# EAGLE board main -old (EAGLE 8.3.1)
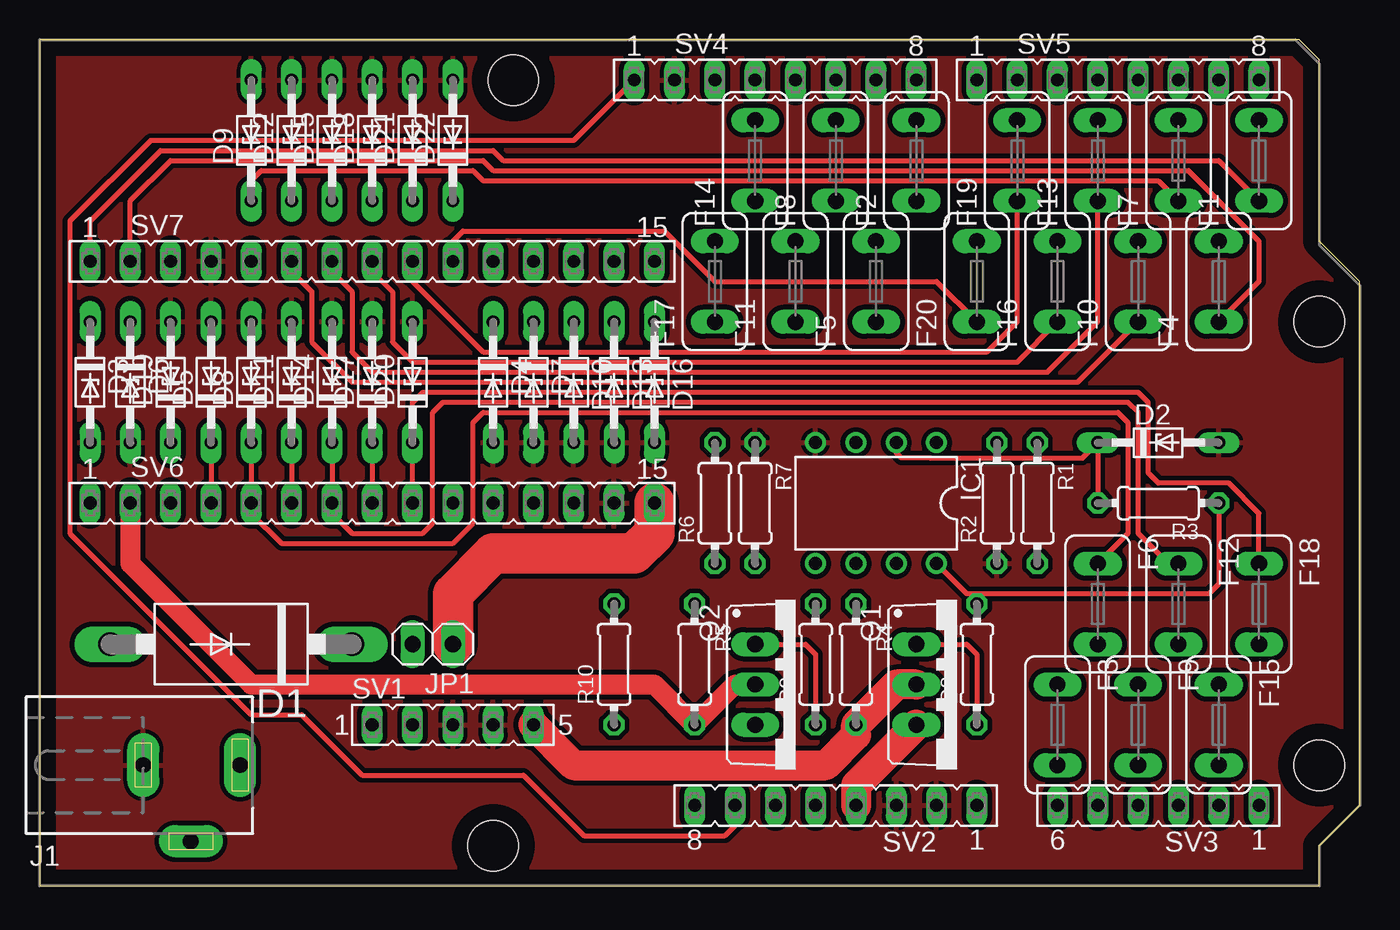
[diagram p0: board, top side]
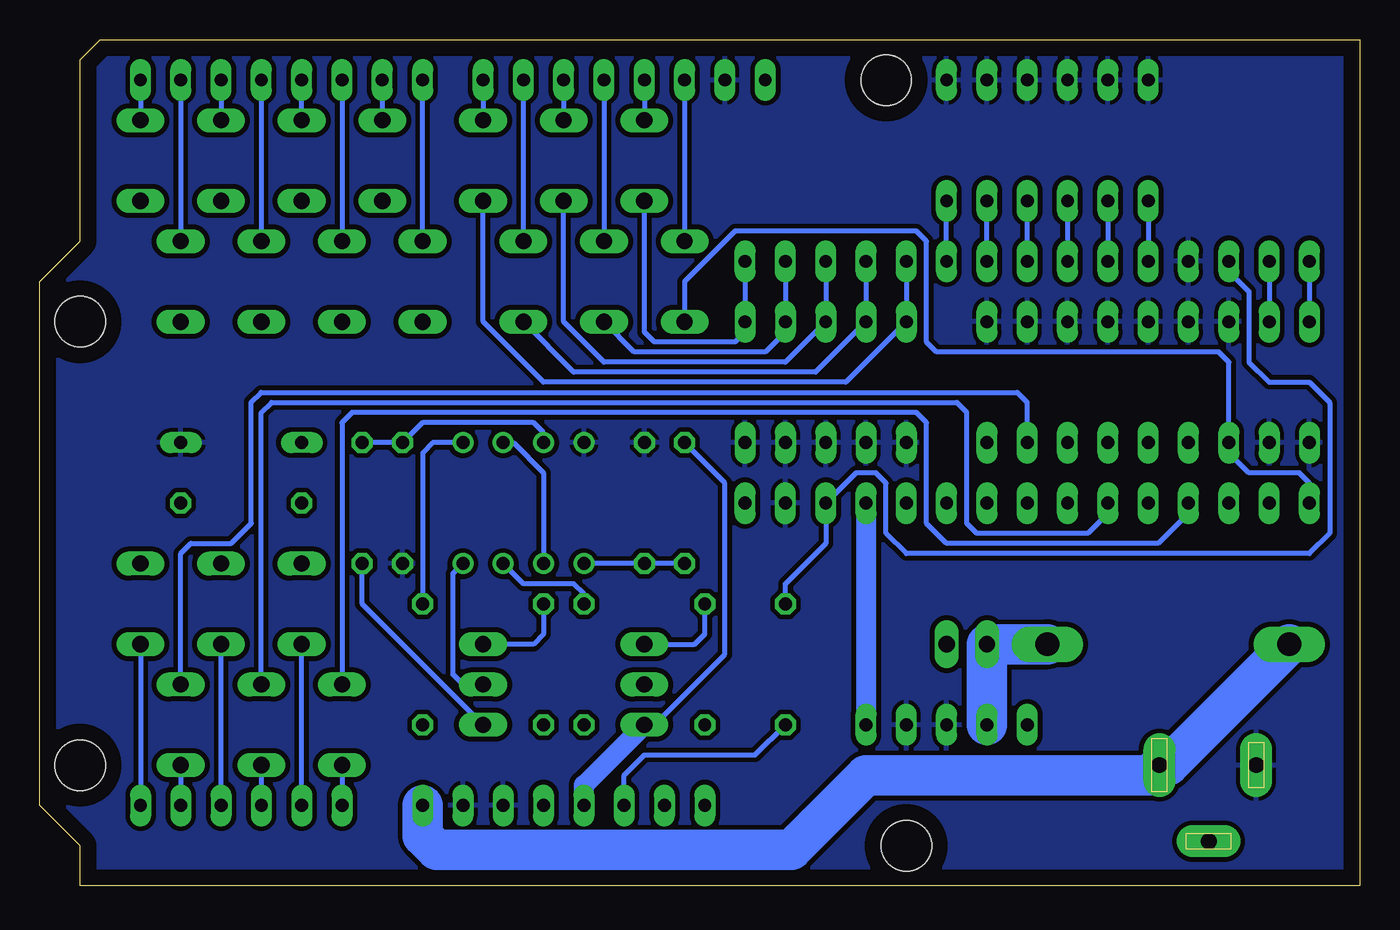
[diagram p1: board, bottom side, seen from below]

Size 83.18 x 53.34 mm. Coordinates in mm from the lower left corner, seen from the top.
Outline: 0,0 80.64,0 80.64,2.54 83.18,5.08 83.18,38.1 80.64,40.64 80.64,52.07 79.38,53.34 0,53.34 0,0
Copper layers (1*16): Top 0.035mm / dielectric 1.5mm / Bottom 0.035mm
Design rules "default": minimum track width 6mil, minimum drill 0.35mm, track to track 6mil, track to pad 6mil, pad to pad 6mil, via to via 6mil, smd to smd 6mil, copper to edge 40mil, drill to drill 6mil, minimum pad ring 10mil, minimum via ring 8mil, stop-mask expansion 4mil, vias tented up to drill 0mil, thermal gap 10mil
Holes 3.17 mm at 29.84,50.8 80.64,35.56 80.64,7.62 28.57,2.54

## Footprints (pad centres in the part's own frame; a part is rotated, then mirrored left to right if it is on the bottom)
P2-15 = drill 1.499 long: A 7.62,0; C -7.62,0
DO34Z7 = drill 0.813 long: A 3.81,0; C -3.81,0
TE5 = drill 1.016 long: 1 -2.54,0; 2 2.54,0
DIL08 = drill 0.813 pad 1.27: 1 -3.81,-3.81; 2 -1.27,-3.81; 3 1.27,-3.81; 4 3.81,-3.81; 5 3.81,3.81; 6 1.27,3.81; 7 -1.27,3.81; 8 -3.81,3.81
DCJ0303 = drill 1 pad 2 long: 1 0,3.1; 2 4.8,0; 3 0,-3
1X02 = drill 1.016 long: 1 -1.27,0; 2 1.27,0
TO220BV = drill 1.016 long: D 0,-2.54; G -2.54,-2.54; S 2.54,-2.54
0204/7 = drill 0.813 octagon: 1 -3.81,0; 2 3.81,0
FE05-1 = drill 0.813 long: 1 -5.08,0; 2 -2.54,0; 3 0,0; 4 2.54,0; 5 5.08,0
FE08 = drill 0.813 long: 1 -8.89,0; 2 -6.35,0; 3 -3.81,0; 4 -1.27,0; 5 1.27,0; 6 3.81,0; 7 6.35,0; 8 8.89,0
FE06 = drill 0.813 long: 1 -6.35,0; 2 -3.81,0; 3 -1.27,0; 4 1.27,0; 5 3.81,0; 6 6.35,0
FE15 = drill 0.813 long: 1 -17.78,0; 2 -15.24,0; 3 -12.7,0; 4 -10.16,0; 5 -7.62,0; 6 -5.08,0; 7 -2.54,0; 8 0,0; 9 2.54,0; 10 5.08,0; 11 7.62,0; 12 10.16,0; 13 12.7,0; 14 15.24,0; 15 17.78,0

## Placement (x,y rotation side)
D1  BA296  [P2-15]  12.06,15.24 180 top
D2  BZX90  [DO34Z7]  70.48,27.94 0 top
D3  BZX90  [DO34Z7]  3.17,31.75 270 top
D4  BZX90  [DO34Z7]  28.57,31.75 270 top
D5  BZX90  [DO34Z7]  10.79,31.75 90 top
D6  BZX90  [DO34Z7]  5.71,31.75 270 top
D7  BZX90  [DO34Z7]  31.11,31.75 270 top
D8  BZX90  [DO34Z7]  13.34,31.75 90 top
D9  BZX90  [DO34Z7]  13.34,46.99 90 top
D10  BZX90  [DO34Z7]  33.66,31.75 270 top
D11  BZX90  [DO34Z7]  15.88,31.75 90 top
D12  BZX90  [DO34Z7]  15.88,46.99 90 top
D13  BZX90  [DO34Z7]  36.2,31.75 270 top
D14  BZX90  [DO34Z7]  18.41,31.75 90 top
D15  BZX90  [DO34Z7]  18.41,46.99 90 top
D16  BZX90  [DO34Z7]  38.73,31.75 270 top
D17  BZX90  [DO34Z7]  20.95,31.75 90 top
D18  BZX90  [DO34Z7]  20.95,46.99 90 top
D19  BZX90  [DO34Z7]  8.26,31.75 90 top
D20  BZX90  [DO34Z7]  23.49,31.75 90 top
D21  BZX90  [DO34Z7]  23.49,46.99 90 top
D22  BZX90  [DO34Z7]  26.04,46.99 90 top
F1  FUSETE5  [TE5]  76.83,45.72 90 top
F2  FUSETE5  [TE5]  55.25,45.72 90 top
F3  FUSETE5  [TE5]  64.13,10.16 270 top
F4  FUSETE5  [TE5]  74.3,38.1 90 top
F5  FUSETE5  [TE5]  52.71,38.1 90 top
F6  FUSETE5  [TE5]  66.67,17.78 270 top
F7  FUSETE5  [TE5]  71.75,45.72 90 top
F8  FUSETE5  [TE5]  50.16,45.72 90 top
F9  FUSETE5  [TE5]  69.21,10.16 270 top
F10  FUSETE5  [TE5]  69.21,38.1 90 top
F11  FUSETE5  [TE5]  47.62,38.1 90 top
F12  FUSETE5  [TE5]  71.75,17.78 270 top
F13  FUSETE5  [TE5]  66.67,45.72 90 top
F14  FUSETE5  [TE5]  45.09,45.72 90 top
F15  FUSETE5  [TE5]  74.3,10.16 270 top
F16  FUSETE5  [TE5]  64.13,38.1 90 top
F17  FUSETE5  [TE5]  42.55,38.1 90 top
F18  FUSETE5  [TE5]  76.83,17.78 270 top
F19  FUSETE5  [TE5]  61.59,45.72 90 top
F20  FUSETE5  [TE5]  59.05,38.1 90 top
IC1  LM358N  [DIL08]  52.71,24.13 180 top
J1  [DCJ0303]  9.53,7.62 270 top
JP1  [1X02]  24.76,15.24 180 top
Q1  IRF9530  [TO220BV]  57.79,12.7 270 top
Q2  IRF9530  [TO220BV]  47.62,12.7 270 top
R1  [0204/7]  62.87,24.13 270 top
R2  [0204/7]  60.33,24.13 90 top
R3  [0204/7]  70.48,24.13 180 top
R4  10k  [0204/7]  51.44,13.97 270 top
R5  10k  [0204/7]  41.27,13.97 270 top
R6  [0204/7]  42.55,24.13 90 top
R7  [0204/7]  45.09,24.13 270 top
R8  300  [0204/7]  59.05,13.97 90 top
R9  300  [0204/7]  48.9,13.97 90 top
R10  1k  [0204/7]  36.2,13.97 90 top
SV1  [FE05-1]  26.04,10.16 0 top
SV2  [FE08]  50.16,5.08 180 top
SV3  [FE06]  70.48,5.08 180 top
SV4  [FE08]  46.36,50.8 0 top
SV5  [FE08]  67.94,50.8 0 top
SV6  [FE15]  20.95,24.13 0 top
SV7  [FE15]  20.95,39.37 0 top

## Library data of the parts
D1-D22 = diode
F1-F20 = fuse; OC_FARNELL: unknown; OC_NEWARK: unknown
IC1 = linear
J1 = con-jack; OC_FARNELL: unknown; OC_NEWARK: unknown
JP1 = pinhead
Q1 Q2 = transistor-power
R1-R10 = rcl
SV1-SV7 = con-lsta; OC_FARNELL: unknown; OC_NEWARK: unknown

## Nets
3V3: Q2.D R5.2 SV6.2
3V3': Q2.S R6.2 SV2.5
3V3EN: IC1.7 R9.2
5V: IC1.8 Q1.D R3.1 R4.2 SV1.5 SV6.12
5V': Q1.S R1.2 SV2.4
5VEN: IC1.1 R8.2
A0: D5.C F3.1 SV6.4
A0': F3.2 SV3.6
A1: D8.C F6.1 SV6.5
A1': F6.2 SV3.5
A2: D11.C F9.1 SV6.6
A2': F9.2 SV3.4
A3: D14.C F12.1 SV6.7
A3': F12.2 SV3.3
A4: D17.C F15.1 SV6.8
A4': F15.2 SV3.2
A5: D20.C F18.1 SV6.9
A5': F18.2 SV3.1
AREF: SV6.3
AREF': SV2.7 SV4.1
D0: D3.C F1.1 SV7.1
D0': F1.2 SV5.8
D1: D6.C F4.1 SV7.2
D1': F4.2 SV5.7
D2: D9.C F7.1 SV7.5
D2': F7.2 SV5.6
D3: D12.C F10.1 SV7.6
D3': F10.2 SV5.5
D4: D15.C F13.1 SV7.7
D4': F13.2 SV5.4
D5: D18.C F16.1 SV7.8
D5': F16.2 SV5.3
D6: D21.C F19.1 SV7.9
D6': F19.2 SV5.2
D7: D22.C F20.1 SV7.10
D7': F20.2 SV5.1
D8: D4.C F2.1 SV7.11
D8': F2.2 SV4.8
D9: D7.C F5.1 SV7.12
D9': F5.2 SV4.7
D10: D10.C F8.1 SV7.13
D10': F8.2 SV4.6
D11: D13.C F11.1 SV7.14
D11': F11.2 SV4.5
D12: D16.C F14.1 SV7.15
D12': F14.2 SV4.4
D13: D19.C F17.1 SV6.1
D13': F17.2 SV4.3
GND: D2.A D3.A D4.A D5.A D6.A D7.A D8.A D9.A D10.A D11.A D12.A D13.A D14.A D15.A D16.A D17.A D18.A D19.A D20.A D21.A D22.A IC1.4 J1.3 R2.1 R7.1 SV1.3 SV1.4 SV2.2 SV2.3 SV4.2 SV6.14 SV7.4
N$2: D1.C JP1.2 SV1.2
N$3: Q2.G R5.1 R9.1
N$4: Q1.G R4.1 R8.1
N$6: IC1.3 R1.1 R2.2
N$7: IC1.5 R6.1 R7.2
RST: R10.2 SV6.13 SV7.3
RST': R10.1 SV2.6
VIN: JP1.1 SV6.15
VIN': D1.A J1.1 SV2.1
VREF2.4: D2.C IC1.2 IC1.6 R3.2

## Tracks (layer width: path | path; a pad name or v marks a point on that pad's centre or on a via)
3V3
  Top 1.27: Q2.D 43.82,12.7 R5.2 38.73,12.7 13.34,12.7 5.71,20.32 SV6.2
3V3'
  Bottom 0.305: Q2.S 44.45,10.16 40.01,14.6 40.01,25.4 R6.2
  Bottom 1.27: SV2.5 48.9,6.35 Q2.S
3V3EN
  Bottom 0.305: R9.2 48.9,18.41 49.53,19.05 52.71,19.05 IC1.7
5V
  Top 0.305: R3.1 74.3,19.05 73.66,18.41 58.42,18.41 IC1.8
  Top 1.905: Q1.D 53.98,12.7 R4.2 51.44,9.52 49.53,7.62 33.66,7.62 SV1.5
  Bottom 0.305: Q1.D 56.52,12.7 57.15,13.34 57.15,19.69 IC1.8
  Bottom 1.27: SV6.12 SV1.5
5V'
  Top 1.905: Q1.S 51.44,6.35 SV2.4
  Bottom 0.305: Q1.S 62.87,17.78 R1.2
5VEN
  Bottom 0.305: IC1.1 58.42,27.94 59.05,27.3 R8.2
A0
  Top 0.305: D5.C SV6.4
  Bottom 0.305: SV6.4 10.79,23.49 12.7,21.59 26.04,21.59 27.3,22.86 27.3,29.21 27.94,29.84 63.5,29.84 64.13,29.21 F3.1
A0'
  Bottom 0.305: F3.2 SV3.6
A1
  Top 0.305: D8.C SV6.5 13.34,23.49 15.24,21.59 26.04,21.59 27.3,22.86 27.3,29.21 27.94,29.84 67.94,29.84 68.58,29.21 68.58,22.23 F6.1
A1'
  Bottom 0.305: SV3.5 F6.2
A2
  Top 0.305: D11.C SV6.6
  Bottom 0.305: SV6.6 15.88,23.49 17.14,22.23 24.13,22.23 24.76,22.86 24.76,29.84 25.4,30.48 68.58,30.48 69.21,29.84 F9.1
A2'
  Bottom 0.305: F9.2 SV3.4
A3
  Top 0.305: D14.C SV6.7 18.41,23.49 19.68,22.23 24.13,22.23 24.76,22.86 24.76,29.84 25.4,30.48 68.58,30.48 69.21,29.84 69.21,22.23 71.12,20.32 F12.1
A3'
  Bottom 0.305: SV3.3 F12.2
A4
  Top 0.305: D17.C SV6.8
  Bottom 0.305: D17.C 20.95,30.48 21.59,31.12 69.24,31.12 69.85,30.51 69.85,22.86 71.12,21.59 73.66,21.59 74.3,20.95 F15.1
A4'
  Bottom 0.305: F15.2 SV3.2
A5
  Top 0.305: SV6.9 D20.C 23.49,30.48 24.13,31.12 69.21,31.12 69.85,30.48 69.85,26.03 70.48,25.4 74.93,25.4 76.83,23.49 F18.1
A5'
  Bottom 0.305: F18.2 SV3.1
AREF'
  Top 0.305: SV2.7 43.82,3.81 43.18,3.18 34.29,3.18 30.48,6.98 20.32,6.98 16.51,10.79 13.34,10.79 1.91,22.23 1.91,41.91 6.99,46.99 33.66,46.99 SV4.1
D0
  Top 0.305: SV7.1 3.17,41.91 7.62,46.35 28.57,46.35 29.21,45.72 74.3,45.72 F1.1
  Bottom 0.305: SV7.1 D3.C
D0'
  Bottom 0.305: SV5.8 F1.2
D1
  Top 0.305: SV7.2 5.71,43.18 8.26,45.72 27.94,45.72 28.57,45.09 72.39,45.09 76.83,40.64 76.83,38.1 F4.1
  Bottom 0.305: SV7.2 D6.C
D1'
  Bottom 0.305: SV5.7 F4.2
D2
  Top 0.305: D9.C 13.34,44.45 13.97,45.09 27.3,45.09 27.94,44.45 70.48,44.45 F7.1
  Bottom 0.305: D9.C SV7.5
D2'
  Bottom 0.305: SV5.6 F7.2
D3
  Top 0.305: SV7.6 15.88,38.73 17.14,37.46 17.14,34.29 19.68,31.75 65.41,31.75 F10.1
  Bottom 0.305: D12.C SV7.6
D3'
  Bottom 0.305: SV5.5 F10.2
D4
  Top 0.305: SV7.7 18.41,38.73 19.68,37.46 19.68,33.66 20.95,32.38 63.5,32.38 66.67,35.56 F13.1
  Bottom 0.305: D15.C SV7.7
D4'
  Bottom 0.305: F13.2 SV5.4
D5
  Top 0.305: SV7.8 20.95,38.73 22.22,37.46 22.22,34.29 23.49,33.02 61.59,33.02 F16.1
  Bottom 0.305: SV7.8 D18.C
D5'
  Bottom 0.305: SV5.3 F16.2
D6
  Top 0.305: SV7.9 23.49,38.1 27.94,33.66 59.69,33.66 61.59,35.56 F19.1
  Bottom 0.305: SV7.9 D21.C
D6'
  Bottom 0.305: SV5.2 F19.2
D7
  Top 0.305: SV7.10 26.04,40.64 26.67,41.27 39.37,41.27 42.55,38.1 56.52,38.1 F20.1
  Bottom 0.305: SV7.10 D22.C
D7'
  Bottom 0.305: F20.2 SV5.1
D8
  Bottom 0.305: SV7.11 D4.C 32.39,31.75 51.44,31.75 55.25,35.56 F2.1
D8'
  Bottom 0.305: SV4.8 F2.2
D9
  Bottom 0.305: SV7.12 D7.C 34.29,32.38 49.53,32.38 F5.1
D9'
  Bottom 0.305: F5.2 SV4.7
D10
  Bottom 0.305: SV7.13 D10.C 36.2,33.02 47.62,33.02 50.16,35.56 F8.1
D10'
  Bottom 0.305: SV4.6 F8.2
D11
  Bottom 0.305: SV7.14 D13.C 36.2,34.92 37.47,33.66 45.72,33.66 F11.1
D11'
  Bottom 0.305: SV4.5 F11.2
D12
  Bottom 0.305: SV7.15 D16.C 38.73,34.92 39.37,34.29 44.45,34.29 45.09,34.92 F14.1
D12'
  Bottom 0.305: SV4.4 F14.2
D13
  Bottom 0.305: SV6.1 3.17,25.4 3.81,26.03 6.99,26.03 8.26,27.3 D19.C 8.26,33.02 8.89,33.66 26.67,33.66 27.3,34.29 27.3,40.64 27.94,41.27 39.37,41.27 42.55,38.1 F17.1
D13'
  Bottom 0.305: SV4.3 F17.2
GND
  pour Bottom (isolate 0.305): 0,0 80.64,0 80.64,2.54 83.18,5.08 83.18,38.1 80.64,40.64 80.64,52.07 79.38,53.34 0,53.34
  pour Top (isolate 0.305): 0,0 80.64,0 80.64,2.54 83.18,5.08 83.18,38.1 80.64,40.64 80.64,52.07 79.38,53.34 0,53.34
N$2
  Bottom 2.54: SV1.2 JP1.2 D1.C
N$3
  Top 0.305: Q2.G 48.26,15.24 48.9,14.6 R9.1
  Bottom 0.305: Q2.G 41.91,15.24 41.27,15.88 R5.1
N$4
  Top 0.305: Q1.G 58.42,15.24 59.05,14.6 R8.1
  Bottom 0.305: R4.1 51.44,15.88 52.07,15.24 Q1.G
N$6
  Bottom 0.305: IC1.3 51.44,28.58 52.07,29.21 59.05,29.21 R2.2 R1.1
N$7
  Bottom 0.305: R6.1 R7.2 IC1.5
RST
  Bottom 0.305: R10.2 36.2,19.05 33.66,21.59 SV6.13 31.75,26.03 30.48,26.03 29.84,25.4 29.84,22.23 28.57,20.95 3.17,20.95 1.91,22.23 1.91,30.48 3.17,31.75 5.71,31.75 6.99,33.02 6.99,37.46 8.26,38.73 SV7.3
RST'
  Bottom 0.305: SV2.6 46.36,6.98 45.09,8.25 38.1,8.25 R10.1
VIN
  Top 2.54: JP1.1 26.04,18.41 28.57,20.95 37.47,20.95 38.73,22.23 SV6.15
VIN'
  Bottom 2.54: D1.A 12.06,7.62 J1.1 13.26,6.98 31.11,6.98 35.81,2.29 58.17,2.29 59.05,3.18 SV2.1
VREF2.4
  Top 0.305: IC1.2 53.98,27.3 54.29,26.99 56.1,26.99 56.12,26.98 65.71,26.98 D2.C R3.2
  Bottom 0.305: IC1.2 53.34,27.94 51.44,26.03 IC1.6

## Text on the board
tDocu: SCL | SDA | AREF | GND | D13 | D12 | D11 | D10 | D9 | D8 | D7 | D6 | D5 | D4 | D3 | D2 | D1/TXO | D0/RXI | MISO | 5V | SCK | MOSI | RST | GND | IOREF | !RESET! | 3.3V | 5V | GND | GND | VIN | A0 | A1 | A2 | A3 | A4 | A5